# Altium PCB HTSSOP-56_L14.0-W6.0-P0.50-LS8.0-BL.pcbdoc
Units mm, origin at the board's own origin, x right, y up, seen from the top; angles counter-clockwise.
Board outline 27.27 x 21.87 mm, 2 copper layers (Top Layer, Bottom Layer); 1 components, 0 nets, 57 pads, 0 vias.
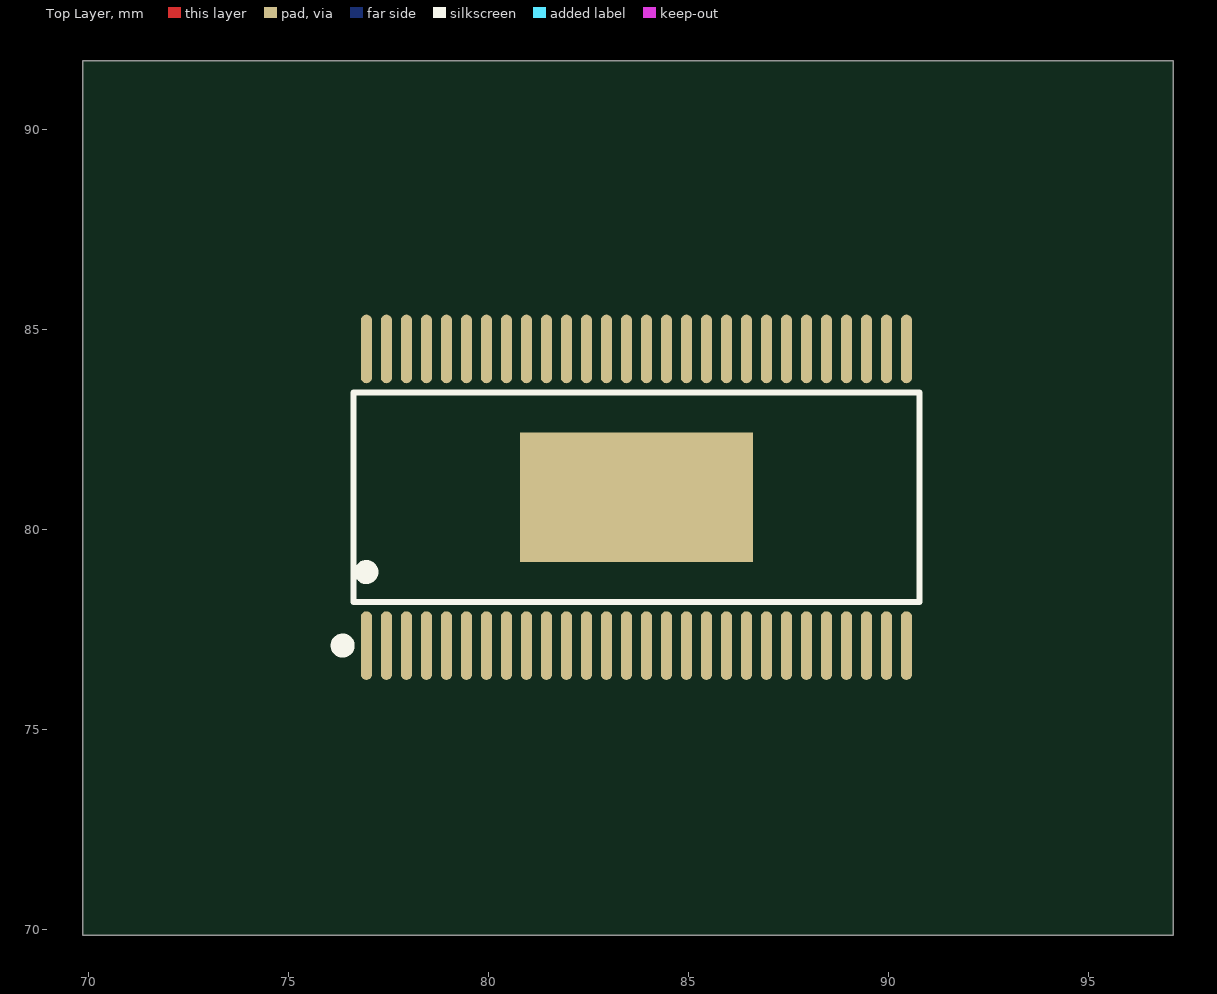
[diagram p0: Top Layer view]
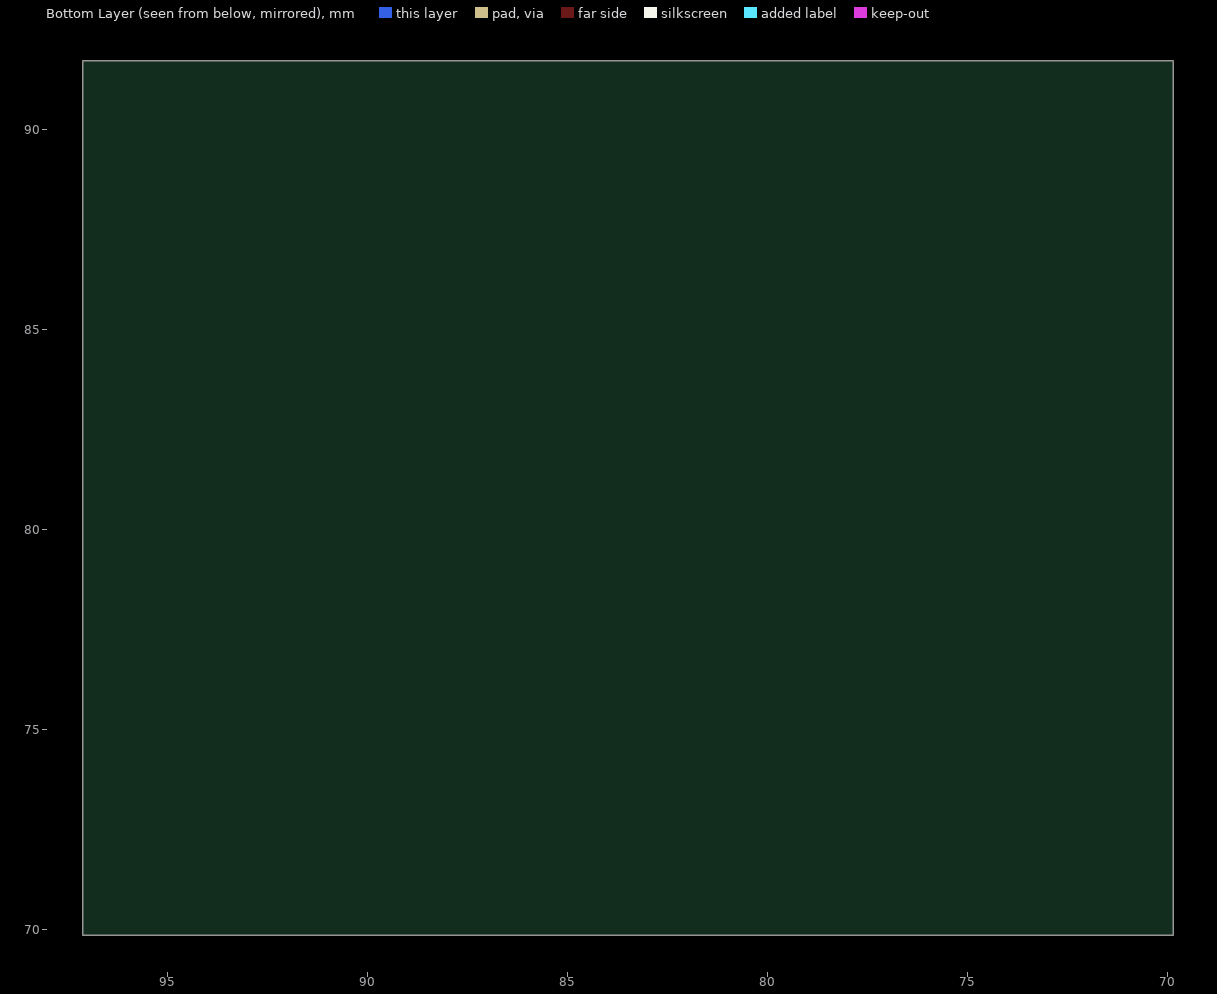
[diagram p1: Bottom Layer view, seen from below]

## Layer stack, top to bottom
Top Layer: signal copper (thickness not stored)
Dielectric: dielectric 0.32, FR-4, Dk 4.8
Bottom Layer: signal copper (thickness not stored)

## Board outline
97.119,69.85 69.85,69.85 69.85,91.715 97.119,91.715

## Design rules (kind name [scope] priority, off if disabled: settings)
Clearance safeClearance [All] p1: gap=0.178 ignorepadtopadclearanceinfootprint=FALSE except(0.152: Track-Track Track-SMDPad SMDPad-SMDPad Track-THPad SMDPad-THPad THPad-THPad Track-Via SMDPad-Via THPad-Via Via-Via Track-Fill SMDPad-Fill THPad-Fill Via-Fill Fill-Fill Track-Region SMDPad-Region THPad-Region Via-Region Fill-Region Region-Region Track-Poly SMDPad-Poly THPad-Poly Via-Poly Fill-Poly Region-Poly Poly-Poly Track-Text SMDPad-Text THPad-Text Via-Text Fill-Text Region-Text Poly-Text Text-Text; 0.175: Track-Hole SMDPad-Hole THPad-Hole Via-Hole Fill-Hole Region-Hole Poly-Hole Text-Hole Sheet-Hole; 0.3: Track-Sheet SMDPad-Sheet THPad-Sheet Via-Sheet Fill-Sheet Region-Sheet Poly-Sheet Text-Sheet)
DiffPairsRouting differentialPair [All] p1: maxuncoupledlength=10 minlimit=6 maxlimit=50 mostfreqgap=6 toplayer_minwidth=5 toplayer_prefwidth=10 toplayer_maxwidth=100 bottomlayer_minwidth=5 bottomlayer_prefwidth=10 bottomlayer_maxwidth=100
PasteMaskExpansion pasteMaskExpansion [All] p1:
PlaneConnect innerPlane [All] p1: planeconnectstyle=Relief reliefexpansion=0.508 reliefentries=4 reliefconductorwidth=0.254 reliefairgap=0.254
PolygonConnect copperRegion [All] p1: connectstyle=Relief reliefentries=4 reliefconductorwidth=10 polygonreliefangle="90 Angle" airgapwidth=10
RoutingVias viaSize [All] p1: viastyle="Through Hole" holewidth=12.0078 minholewidth=11.811 maxholewidth=236.2204 width=24.0158 minwidth=19.685 maxwidth=393.7008
SolderMaskExpansion solderMaskExpansion [All] p1: useseparateexpansions=TRUE expansion=2 expansionbottom=2
Width trackWidth [All] p1: maxlimit=100 minlimit=5 preferedwidth=10

## Components (designator, comment, footprint, x,y, rotation, side; value= is the part's Value field where it differs from the comment)
? "HTSSOP-56_L14.0-W6.0-P0.50-LS8.0-BL" HTSSOP-56_L14.0-W6.0-P0.50-LS8.0-BL 83.692,80.8 r0 top

## Footprints (in the part's own frame and the unit in brackets; to place one, negate y for a bottom-side part, rotate by r counter-clockwise, add the part's x,y. Pads: shape width x height; smd on the part's side, far side on the other; paste and mask are expansions set on the pad)
HTSSOP-56_L14.0-W6.0-P0.50-LS8.0-BL [mm]
  oval 0.28x1.715 smd: 1(-6.75,-3.708) 2(-6.25,-3.708) 3(-5.75,-3.708) 4(-5.25,-3.708) 5(-4.75,-3.708) 6(-4.25,-3.708) 7(-3.75,-3.708) 8(-3.25,-3.708) 9(-2.75,-3.708) 10(-2.25,-3.708) 11(-1.75,-3.708) 12(-1.25,-3.708) 13(-0.75,-3.708) 14(-0.25,-3.708) 15(0.25,-3.708) 16(0.75,-3.708) 17(1.25,-3.708) 18(1.75,-3.708) 19(2.25,-3.708) 20(2.75,-3.708) 21(3.25,-3.708) 22(3.75,-3.708) 23(4.25,-3.708) 24(4.75,-3.708) 25(5.25,-3.708) 26(5.75,-3.708) 27(6.25,-3.708) 28(6.75,-3.708) 29(6.75,3.708) 30(6.25,3.708) 31(5.75,3.708) 32(5.25,3.708) 33(4.75,3.708) 34(4.25,3.708) 35(3.75,3.708) 36(3.25,3.708) 37(2.75,3.708) 38(2.25,3.708) 39(1.75,3.708) 40(1.25,3.708) 41(0.75,3.708) 42(0.25,3.708) 43(-0.25,3.708) 44(-0.75,3.708) 45(-1.25,3.708) 46(-1.75,3.708) 47(-2.25,3.708) 48(-2.75,3.708) 49(-3.25,3.708) 50(-3.75,3.708) 51(-4.25,3.708) 52(-4.75,3.708) 53(-5.25,3.708) 54(-5.75,3.708) 55(-6.25,3.708) 56(-6.75,3.708)
  rect 5.825x3.235 smd: 57(0,0)
  silkscreen extent -7.49,-3.86 7.08,2.62

## Nets (pads, with @x,y where several pads share a name; then routed paths per layer and width w, separated by ;. In a path a pad name is that pad's centre, name@x,y a point inside that pad or via, vN(x,y) a via of type N, cw(c..) or ccw(c..) an arc to the next point about the centre after c; other vN are vias at no path point)
pads on no net: ?.1 ?.2 ?.3 ?.4 ?.5 ?.6 ?.7 ?.8 ?.9 ?.10 ?.11 ?.12 ?.13 ?.14 ?.15 ?.16 ?.17 ?.18 ?.19 ?.20 ?.21 ?.22 ?.23 ?.24 ?.25 ?.26 ?.27 ?.28 ?.29 ?.30 ?.31 ?.32 ?.33 ?.34 ?.35 ?.36 ?.37 ?.38 ?.39 ?.40 ?.41 ?.42 ?.43 ?.44 ?.45 ?.46 ?.47 ?.48 ?.49 ?.50 ?.51 ?.52 ?.53 ?.54 ?.55 ?.56 ?.57